# Altium PCB PCB2.PcbDoc
Units mm, origin at the board's own origin, x right, y up, seen from the top; angles counter-clockwise.
Board outline 100 x 65 mm, 2 copper layers (Top Layer, Bottom Layer); 34 components, 29 nets, 186 pads, 10 vias.
Unrouted connection lines stored in the file: 2.
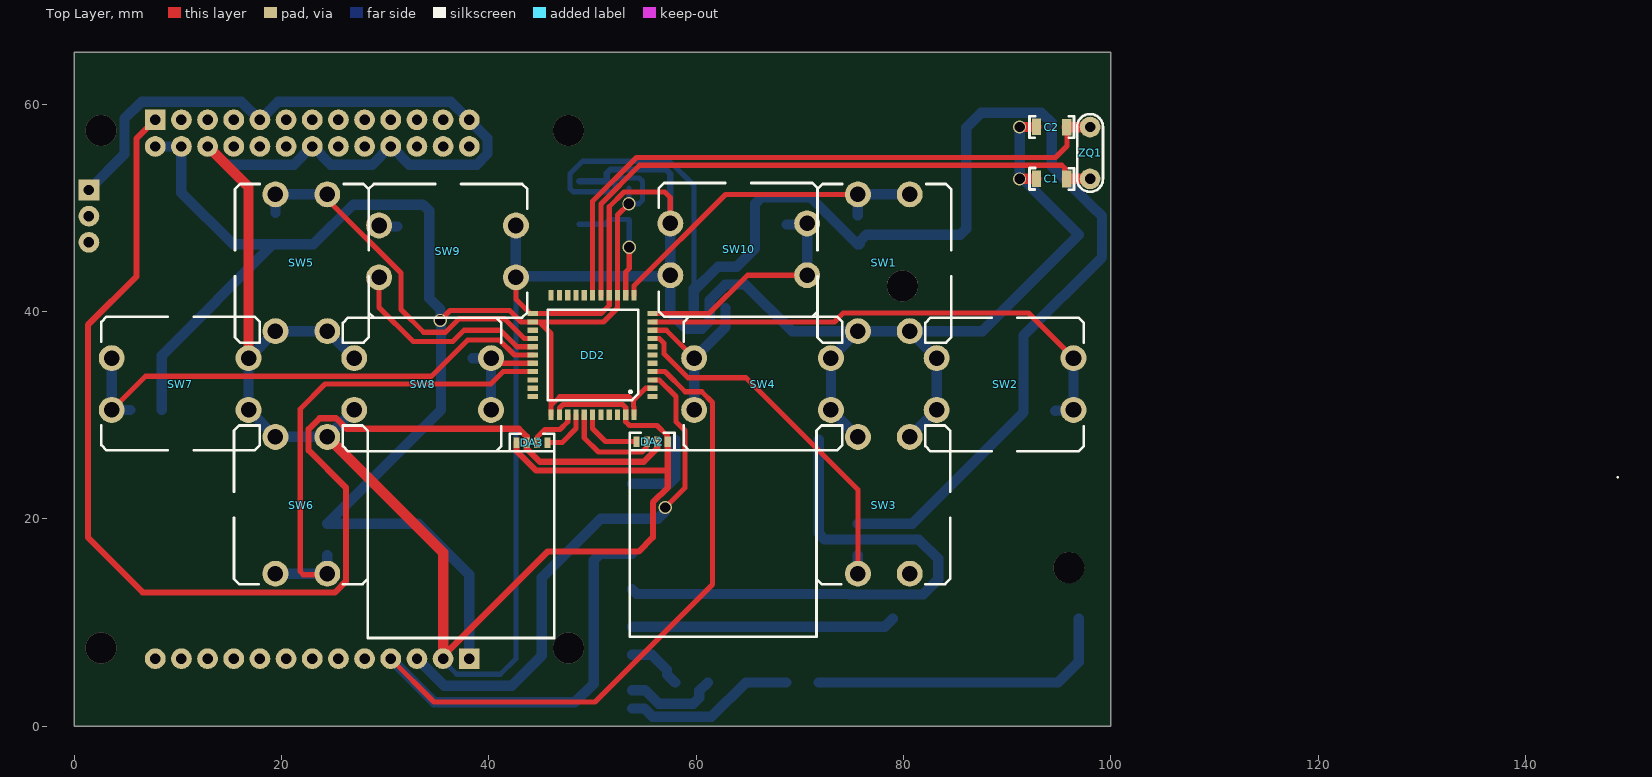
[diagram p0: Top Layer view]
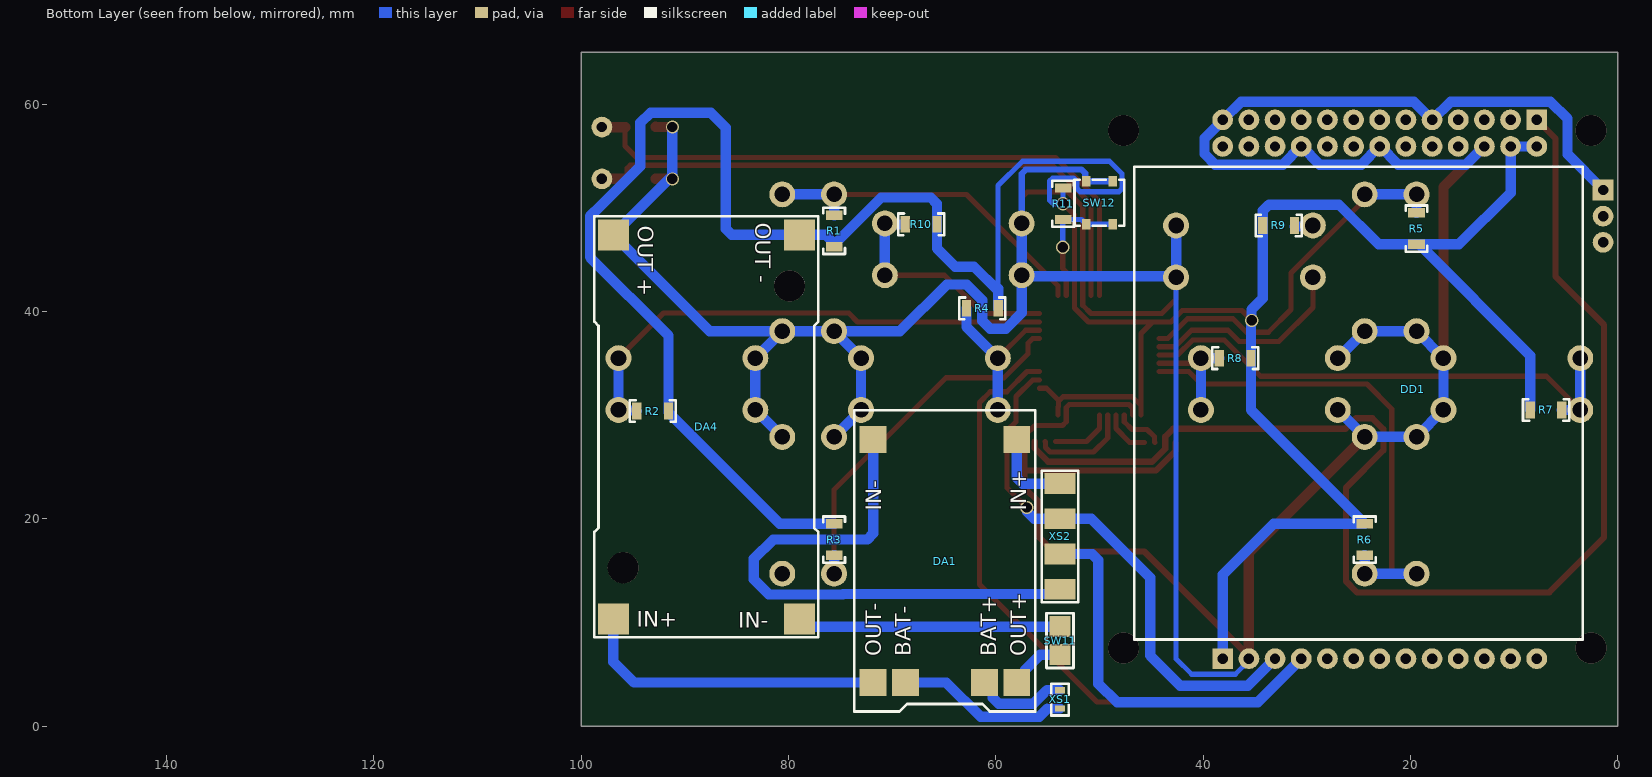
[diagram p1: Bottom Layer view, seen from below]
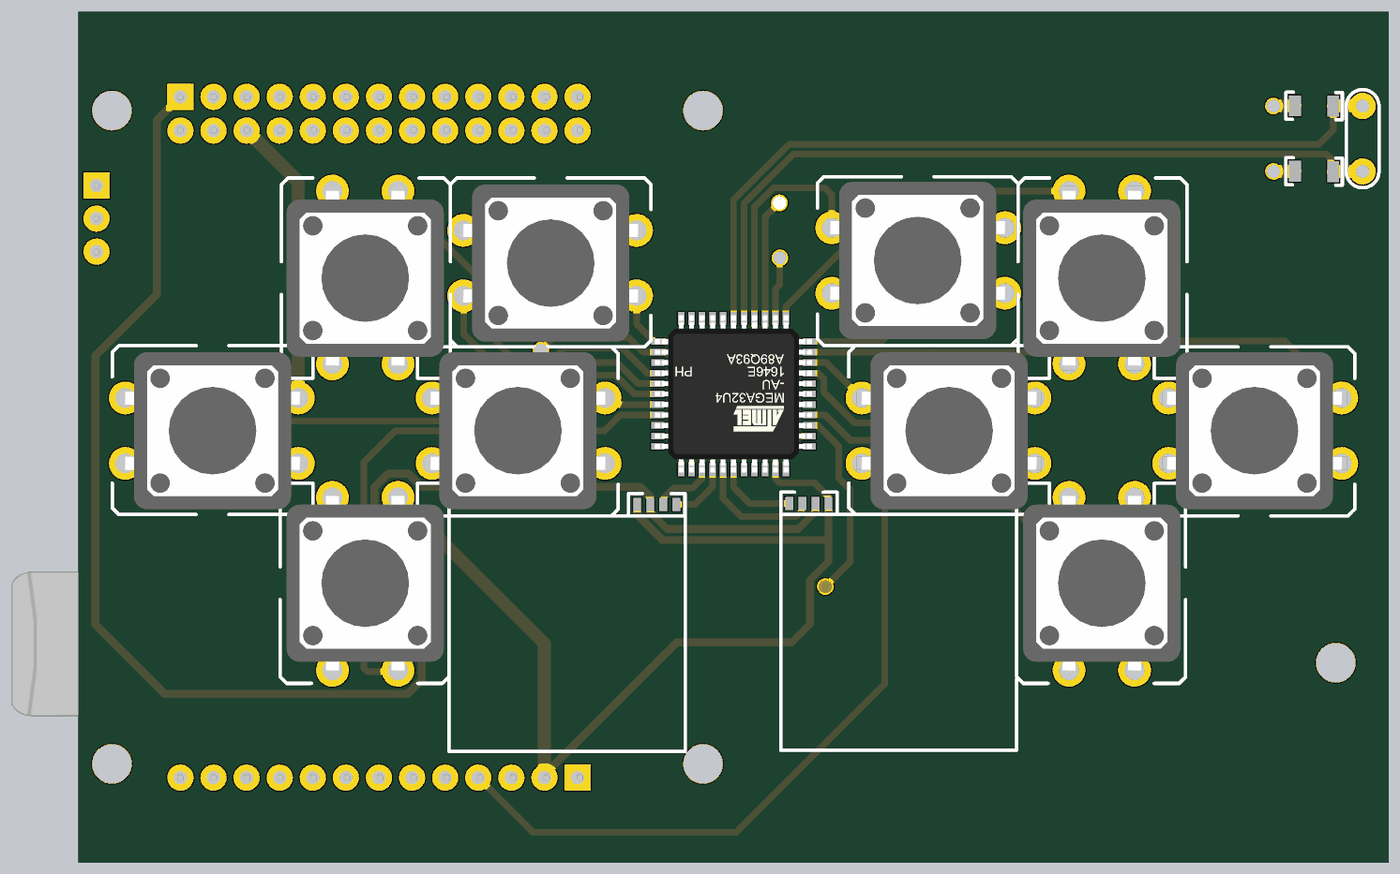
[diagram p2: 3D render of the assembled board from above, using the file's embedded part models]
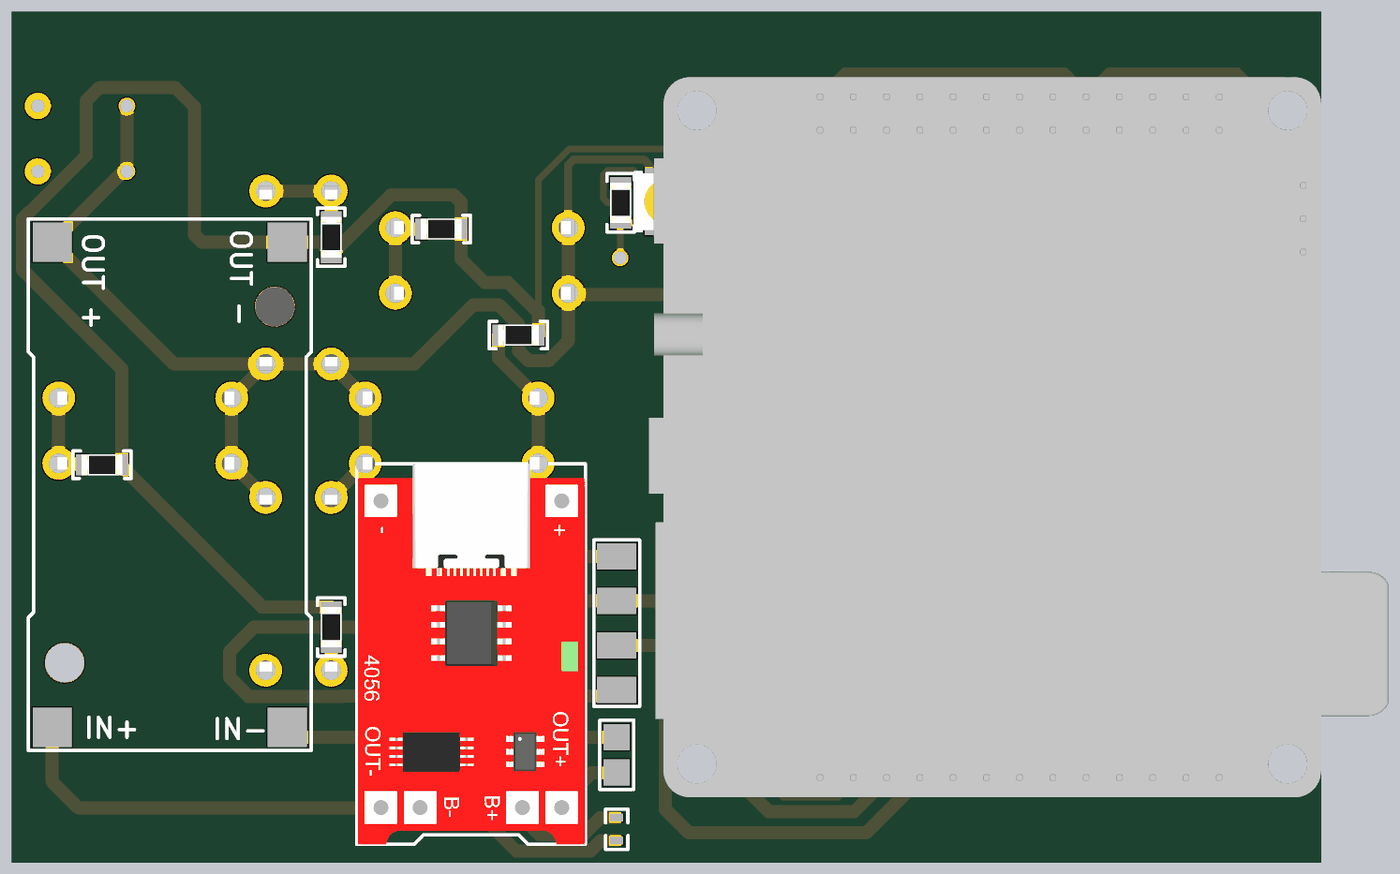
[diagram p3: 3D render of the assembled board from below, using the file's embedded part models]

## Layer stack, top to bottom
Top Solder: solder mask 0.0102, Solder Resist, Dk 3.5
Top Layer: signal copper 0.0356
Dielectric 1: dielectric 0.32, FR-4, Dk 4.8
Bottom Layer: signal copper 0.0356
Bottom Solder: solder mask 0.0102, Solder Resist, Dk 3.5

## Board outline
0,0 100,0 100,65 0,65

## Design rules (kind name [scope] priority, off if disabled: settings)
Clearance [All] p1: gap=0.254 ignorepadtopadclearanceinfootprint=FALSE
PolygonConnect [All] p1: connectstyle=Relief reliefconductorwidth=0.254 reliefentries=4 polygonreliefangle="90 Angle" airgapwidth=0.254
RoutingVias [All] p1: holewidth=1 width=1.27 viastyle="Through Hole" minholewidth=1 minwidth=1.27 maxholewidth=1 maxwidth=1.27
SolderMaskExpansion [All] p1: expansion=0.102 istentingtop=FALSE
SupplyNets "Schematic Supply Nets_2" [InNet('GND')] p1: voltage=0.000
SupplyNets "Schematic Supply Nets_1" [InNet('+5V')] p2: voltage=0.000
SupplyNets "Schematic Supply Nets" [InNet('+3.3V')] p3: voltage=0.000
Width [All] p1: maxlimit=1 minlimit=0.5 preferedwidth=0.6 minimp=50.000000 maximp=50.000000 favimp=50.000000
30 further rules are at their usual default settings.

## Components (designator, comment, footprint, x,y, rotation, side; value= is the part's Value field where it differs from the comment)
C1 "capasitor" "capacitor 1206" 94.3,52.8 r0 top
C2 "capasitor" "capacitor 1206" 94.3,57.8 r0 top
DA1 "1S 4056 BMS USB C" "1S 4056 BMS USB C" 64.8,15.5 r90 bottom
DA2 "joy stick 4 pin" "joy stick psp 4 pin" 55.748,27.45 r0 top
DA3 "joy stick 4 pin" "joy stick psp 4 pin" 44.147,27.35 r180 top
DA4 "DC-DC" DC-DC 87.925,28.875 r270 bottom
DD1 "orange PI ZERO 3" "orange Pi Zero 3" 25.125,32.5 r270 bottom locked
DD2 "ATmega32U4" atmega32u4 50,35.8 r180 top
R1 "resistor" "resistor 1206" 75.6,47.775 r270 bottom
R2 "resistor" "resistor 1206" 93.1,30.4 r180 bottom
R3 "resistor" "resistor 1206" 75.6,18 r90 bottom
R4 "resistor" "resistor 1206" 61.3,40.3 r180 bottom
R5 "resistor" "resistor 1206" 19.4,48 r270 bottom
R6 "resistor" "resistor 1206" 24.4,18 r90 bottom
R7 "resistor" "resistor 1206" 6.9,30.5 r0 bottom
R8 "resistor" "resistor 1206" 36.9,35.5 r180 bottom
R9 "resistor" "resistor 1206" 32.7,48.3 r0 bottom
R10 "resistor" "resistor 1206" 67.2,48.4 r180 bottom
R11 "resistor" "resistor 1206" 53.5,50.4 r90 bottom
SW1 "button" switchv1 78.2,44.5 r0 top locked
SW2 "button" switchv1 89.6,32.9 r270 top
SW3 "button" switchv1 78,21.5 r180 top
SW4 "button" switchv1 66.6,33.1 r90 top
SW5 "button" switchv1 22,44.5 r0 top
SW6 "button" switchv1 21.8,21.5 r180 top
SW7 "button" switchv1 10.4,33.1 r90 top
SW8 "button" switchv1 33.4,32.9 r270 top
SW9 "button" switchv1 36.2,45.9 r90 top
SW10 "button" switchv1 63.9,45.9 r270 top
SW11 "button" PowerButton 53.8,6.9 r90 bottom
SW12 "button" "membrane button" 49.995,50.5 r270 bottom
XS1 "power" power 53.825,2.55 r270 bottom
XS2 "TYPE-C" TYPE-C 53.8,18.3 r90 bottom
ZQ1 "quartz resonator" "quartz resonator 2" 98,55.3 r270 top

## Footprints (in the part's own frame and the unit in brackets; to place one, negate y for a bottom-side part, rotate by r counter-clockwise, add the part's x,y. Pads: shape width x height; smd on the part's side, far side on the other; paste and mask are expansions set on the pad)
"1S 4056 BMS USB C" [mm]
  rect 2.6x2.6 smd: 1(12.15,7.025) 2(12.15,-6.825) 3(-11.3,-3.7) 4(-11.3,3.9) 5(-11.3,7.025) 6(-11.3,-6.825)
  silkscreen extent -14.1,-8.6 14.97,8.85, body extent -14.11,-8.55 14.97,8.75, height 5.26
atmega32u4 [mm]
  rect 1x0.5 smd: 1(-5.775,4) 2(-5.775,3.2) 3(-5.775,2.4) 4(-5.775,1.6) 5(-5.775,0.8) 6(-5.775,0) 7(-5.775,-0.8) 8(-5.775,-1.6) 9(-5.775,-2.4) 10(-5.775,-3.2) 11(-5.775,-4) 23(5.775,-4) 24(5.775,-3.2) 25(5.775,-2.4) 26(5.775,-1.6) 27(5.775,-0.8) 28(5.775,0) 29(5.775,0.8) 30(5.775,1.6) 31(5.775,2.4) 32(5.775,3.2) 33(5.775,4)
  rect 0.5x1 smd: 12(-4,-5.775) 13(-3.2,-5.775) 14(-2.4,-5.775) 15(-1.6,-5.775) 16(-0.8,-5.775) 17(0,-5.775) 18(0.8,-5.775) 19(1.6,-5.775) 20(2.4,-5.775) 21(3.2,-5.775) 22(4,-5.775) 34(4,5.775) 35(3.2,5.775) 36(2.4,5.775) 37(1.6,5.775) 38(0.8,5.775) 39(0,5.775) 40(-0.8,5.775) 41(-1.6,5.775) 42(-2.4,5.775) 43(-3.2,5.775) 44(-4,5.775)
  silkscreen extent -4.4,-4.38 4.33,4.35, body extent -6,-6 6,6, height 1.05
"capacitor 1206" [mm]
  rect 0.9x1.6 smd: 1(-1.462,0.013) 2(1.463,-0.012)
  silkscreen extent -2.15,-1.05 2.15,1.05, body extent -1.56,-0.74 1.54,0.76, height 1.61
DC-DC [mm]
  rect 3x3 smd: 1(18.525,8.975) 2(18.525,-8.975) 3(-18.525,-8.975) 4(-18.525,8.975)
  round 3 hole 3: ""(-13.6,8.025) ""(13.6,-8.025)
  silkscreen extent -20.3,-10.8 20.3,10.8, body extent -20.1,-10.55 20.1,10.55, height 13.25
"joy stick psp 4 pin" [mm]
  rect 0.6x1 smd: 1(-1.5,0) 2(-0.5,0) 3(0.5,0) 4(1.5,0)
  silkscreen extent -2.15,-0.85 2.15,0.85
"membrane button" [mm]
  rect 1x0.8 smd: 1(-2.075,1.275) 1(-2.065,-1.274) 2(2.075,-1.275) 2(2.085,1.276)
  silkscreen extent -2.22,-2.41 2.23,2.4, body extent -2.22,-2.39 2.22,2.39, height 0.84
"orange Pi Zero 3" [mm]
  rect 2x2 hole 1: 1(-26,17.325) 27(-19.225,23.725) 42(26,-12.975)
  round 2 hole 1: 2(-26,14.8) 3(-26,12.275) 4(-26,9.75) 5(-26,7.225) 6(-26,4.7) 7(-26,2.175) 8(-26,-0.35) 9(-26,-2.875) 10(-26,-5.4) 11(-26,-7.925) 12(-26,-10.45) 13(-26,-12.975) 14(-23.425,17.325) 15(-23.425,14.8) 16(-23.425,12.275) 17(-23.425,9.75) 18(-23.425,7.225) 19(-23.425,4.7) 20(-23.425,2.175) 21(-23.425,-0.35) 22(-23.425,-2.875) 23(-23.425,-5.4) 24(-23.425,-7.925) 25(-23.425,-10.45) 26(-23.425,-12.975) 28(-16.7,23.725) 29(-14.175,23.725) 30(26,17.325) 31(26,14.8) 32(26,12.275) 33(26,9.75) 34(26,7.225) 35(26,4.7) 36(26,2.175) 37(26,-0.35) 38(26,-2.875) 39(26,-5.4) 40(26,-7.925) 41(26,-10.45)
  silkscreen extent -21.45,-21.5 24.15,21.75, body extent -27.5,-26.2 27.5,30.23, height 18.7
power [mm]
  rect 0.6x1 smd: 1(-0.9,0.025) 2(0.85,0.025)
  silkscreen extent -1.55,-0.82 1.53,0.88
PowerButton [mm]
  rect 2x2 smd: 1(0,0) 2(2.7,0)
  silkscreen extent -1.3,-1.3 4,1.3
"quartz resonator 2" [mm]
  round 2 hole 1: 1(-2.5,0) 2(2.5,0)
  silkscreen extent -3.75,-1.25 3.75,1.25
"resistor 1206" [mm]
  rect 0.9x1.6 smd: 1(-1.525,0) 2(1.525,0)
  silkscreen extent -2.22,-1.05 2.23,1.05, body extent -1.55,-0.8 1.55,0.8, height 0.56
switchv1 [mm]
  round 2.5 hole 1.5: 1(-2.6,-6.4) 1(2.4,-6.4) 2(-2.6,6.8) 2(2.4,6.8)
  silkscreen extent -6.5,-7.5 6.4,7.8, body extent -6.1,-6.9 5.9,7.2, height 8.41
TYPE-C [mm]
  rect 2x3 smd: 1(-5.1,0) 2(-1.7,0) 3(1.7,0) 4(5.1,0)
  silkscreen extent -6.36,-1.75 6.35,1.75

## Via types
v1: diameter 1.27, hole 1, Top Layer to Bottom Layer, 6 vias
v2: diameter 3, hole 3, Top Layer to Bottom Layer, 4 vias

## Nets (pads, with @x,y where several pads share a name; then routed paths per layer and width w, separated by ;. In a path a pad name is that pad's centre, name@x,y a point inside that pad or via, vN(x,y) a via of type N, cw(c..) or ccw(c..) an arc to the next point about the centre after c; other vN are vias at no path point)
+3.3V: DA2.3 DA3.3 DD1.1 | length 124.4
  Top Layer w0.6: DD1.1 6,56.7 6,43.4 1.3,38.7 1.3,18.2 6.604,12.896 25.147,12.896 26.204,13.953 26.204,22.996 22.596,26.604 22.596,28.647 23.653,29.704 25.245,29.704 26.253,28.696 42.885,28.696 43.647,27.933 DA3.3 43.647,26.767 44.914,25.5 54.948,25.5 56.248,26.8 DA2.3
+5V: DA4.4 DD1.14 DD1.15 DD1.42 DD2.2 DD2.14 DD2.24 DD2.34 DD2.44 R1.2 R2.2 R3.2 R4.2 R5.2 R6.2 R7.2 R8.2 R9.2 R10.2 R11.2 | length 312
  Top Layer w0.5: v1(35.3,39.147) 36.253,40.1 42,40.1 43.1,39 44.888,39 ; DD2.34 46,30.954 ; v1(53.5,50.4) 52.4,49.3 DD2.14 52.4,40.334 51.066,39 44.888,39 ; DD2.44 54,30.795 53.954,30.841 53.954,31.341 53.512,31.783 46.829,31.783 46,30.954 ; 54,31.488 55.112,32.6 DD2.2 ; 44.888,39 46,37.888 46,30.954
  Bottom Layer w0.5: R11.2 v1(53.5,50.4) 54.474,50.4 54.804,50.73 54.804,52.584 54.509,52.879 52.491,52.879 52.173,52.561 52.173,51.856 51.878,51.561 48.121,51.561 47.816,51.866 47.816,53.284 49.036,54.504 57.433,54.504 59.775,52.162 59.775,42.2
  Bottom Layer w1: DD1.14 DD1.15 10.325,51.475 15.325,46.475 R5.2@19.15,46.475 ; R7.2 8.425,35.75 R5.2@19.15,46.475 ; v1(35.3,39.147) 35.325,39.172 35.325,40.175 34.225,41.275 R9.2 34.225,49.718 33.639,50.304 26.88,50.304 23.051,46.475 R5.2@19.15,46.475 ; v1@35.325,39.002 35.375,38.952 R8.2 35.375,30.5 R6.2 33.175,19.525 38.1,14.6 DD1.42 ; R4.2 59.775,42.2 ; 59.825,42.042 62.1,44.317 63.892,44.317 65.675,46.1 65.675,50.414 66.261,51 71.034,51 75.559,46.475 75.75,46.475 75.8,46.525 75.8,46.775 76.425,47.4 DA4.4 85.467,47.4 86.053,47.986 86.053,57.753 87.489,59.189 93.311,59.189 94.3,58.2 94.3,54.019 98.665,49.654 98.712,49.654 99.154,49.212 99.154,45.256 91.575,37.677 R2.2 91.575,30.25 80.85,19.525 R3.2
GND: C1.1 C2.1 DA2.4 DA3.4 DA4.3 DD1.5 DD1.13 DD1.16 DD1.20 DD1.23 DD1.27 DD1.41 DD2.15 DD2.23 DD2.35 DD2.43 SW1.1 SW2.1 SW3.1 SW4.1 SW5.1 SW6.1 SW7.1 SW8.1 SW9.1 SW10.1 SW12.1 | length 431
  Top Layer w0.5: SW9.1@42.6,43.3 42.6,41.175 43.975,39.8 DD2.23 50.8,39.8 51.6,40.6 DD2.15 51.6,50.111 53.028,51.539 56.961,51.539 57.5,51 SW10.1@57.5,48.5 ; DD2.35 46.8,30.688 47.141,31.029 52.907,31.029 53.2,30.736 53.2,29.362 53.562,29 56.211,29 57.198,28.013 57.198,27.5 DA2.4
  Top Layer w0.6: DD1.41@35.575,6.758 45.647,16.831 54.431,16.831 55.82,18.22 55.82,21.583 57.248,23.011 57.248,24.7 ; DA3.4 42.647,26.559 44.56,24.646 57.194,24.646 57.248,24.7 ; DA2.4 57.248,24.7
  Top Layer w1: DD1.16 16.8,51.975 SW7.1@16.8,35.5 ; SW6.1@24.4,27.9 35.575,16.725 35.575,6.758 DD1.41 ; v1(91.2,52.8) 91.206,52.806 92.831,52.806 C1.1 ; v1@91.2,57.806 92.831,57.806 C2.1
  Bottom Layer w0.5: DD1.41 35.575,6.312 36.891,4.996 41.096,4.996 42.6,6.5 SW9.1@42.6,43.3
  Bottom Layer w0.6: SW12.1@48.72,52.575 48.725,52.57 51.264,52.57 51.269,52.565 51.369,52.665 51.369,53.349 51.721,53.7 57.1,53.7 57.5,53.3 SW10.1@57.5,48.5
  Bottom Layer w1: DD1.27 4.829,55.154 4.829,58.595 6.488,60.254 16.118,60.254 17.872,58.5 DD1.5 17.928,58.5 19.682,60.254 36.318,60.254 38.072,58.5 DD1.13 38.1,58.472 39.854,56.718 39.854,55.198 38.827,54.171 32.307,54.171 30.553,55.925 DD1.23 30.497,55.925 28.743,54.171 24.732,54.171 22.978,55.925 DD1.20 22.922,55.925 21.168,54.171 14.632,54.171 12.878,55.925 DD1.16 ; SW8.1@27,30.5 24.4,27.9 19.4,27.9 16.8,30.5 16.8,35.5 19.4,38.1 24.4,38.1 SW8.1@27,35.5 ; SW9.1@42.6,48.3 42.6,43.3 42.7,43.4 57.4,43.4 SW10.1@57.5,43.5 ; SW10.1@57.5,48.5 SW10.1@57.5,43.5 ; SW3.1@75.6,27.9 73,30.5 73,35.5 SW1.1@75.6,38.1 ; SW3.1@80.6,27.9 83.2,30.5 83.2,35.5 SW1.1@80.6,38.1 ; v1(91.2,57.8) v1(91.2,52.8) 91.252,52.748 91.552,52.748 DA4.3 87.6,38.1 SW1.1@80.6,38.1 ; SW10.1@57.5,43.5 57.5,39.859 59.013,38.346 60.537,38.346 61.3,39.109 61.3,41.1 62.8,42.6 64.75,42.6 69.25,38.1 SW1.1@75.6,38.1 ; SW1.1@75.6,38.1 SW1.1@80.6,38.1
NetC1_2: C1.2 DD2.16 ZQ1.2 | length 58.6
  Top Layer w0.5: DD2.16 50.8,50.377 54.539,54.117 95.27,54.117 95.562,53.824 95.562,52.988 C1.2
  Top Layer w1: C1.2 95.769,52.794 97.994,52.794 ZQ1.2
NetC2_2: C2.2 DD2.17 ZQ1.1 | length 61.1
  Top Layer w0.5: DD2.17 50,50.643 54.227,54.871 94.671,54.871 95.763,55.962 C2.2
  Top Layer w1: C2.2 95.769,57.794 97.994,57.794 ZQ1.1
NetDA1_1: DA1.1 XS2.1 | length 53.9
  Bottom Layer w1: XS2.1 54.253,12.747 74.719,12.747 74.77,12.696 81.896,12.696 83.347,14.147 83.347,16.128 81.475,18 72.411,18 71.825,18.586 DA1.1
NetDA1_2: DA1.2 XS2.4 | length 8.1
  Bottom Layer w1: XS2.4@53.812,23.388 57.389,23.388 57.975,23.974 DA1.2
NetDA1_3: DA1.3 XS1.1 | length 9.1
  Bottom Layer w1: XS1.1 55.059,3.45 56.363,2.146 59.714,2.146 60.3,2.732 60.3,3.4 DA1.3
NetDA1_4: DA1.4 XS1.2 | length 16.6
  Bottom Layer w1: XS1.2 55,1.7 55.808,0.892 61.458,0.892 64.766,4.2 DA1.4
NetDA1_5: DA1.5 DA4.2 | length 30.1
  Bottom Layer w1: DA1.5 94.9,4.2 96.9,6.2 DA4.2
NetDA1_6: DA1.6 SW11.1 | length 5.5
  Bottom Layer w1: SW11.1 53.814,6.886 55.714,6.886 57.175,5.425 57.175,5 DA1.6
NetDA2_1: DA2.1 DD2.39 | length 6.1
  Top Layer w0.5: DD2.39 50,28.7 51.25,27.45 DA2.1
NetDA2_2: DA2.2 DD2.38 | length 9.6
  Top Layer w0.5: DD2.38 49.2,27.8 50.554,26.446 54.757,26.446 55.198,26.887 55.198,27.4 DA2.2
NetDA3_1: DA3.1 DD2.37 | length 4.6
  Top Layer w0.5: DA3.1 45.681,27.35 45.697,27.367 47.067,27.367 48.4,28.7 DD2.37
NetDA3_2: DA3.2 DD2.36 | length 4.7
  Top Layer w0.5: DA3.2 44.697,27.4 44.697,27.913 45.399,28.614 46.852,28.614 47.6,29.362 DD2.36
NetDA4_1: DA4.1 SW11.2 | length 25.5
  Bottom Layer w1: SW11.2 78.2,9.6 DA4.1
NetDD1_39: DD1.39 DD2.4 XS2.2 | length 99.9
  Top Layer w0.5: DD1.39 34.689,2.335 50.235,2.335 61.554,13.654 61.554,31.227 60.527,32.254 58.946,32.254 57,34.2 DD2.4
  Bottom Layer w1: DD1.39 34.725,2.3 48.3,2.3 50.1,4.1 50.1,16.014 50.686,16.6 XS2.2
NetDD1_40: DD1.40 DD2.3 XS2.3 | length 51.6
  Top Layer w0.5: DD2.3 56.438,33.4 58.046,31.792 58.046,29.371 58.905,28.513 58.905,22.986 v1(57.009,21.091)
  Bottom Layer w1: DD1.40 33.078,6.5 35.678,3.9 42.2,3.9 45.106,6.806 45.106,14.306 50.8,20 56.299,20 56.958,20.659 56.958,21.039 v1(57.009,21.091)
NetDD2_8: DD2.8 R3.1 SW3.2 | length 36.3
  Top Layer w0.5: DD2.8 56.438,37.4 56.9,36.938 56.9,35.919 59.219,33.6 64.8,33.6 75.6,22.8 SW3.2@75.6,14.7
  Bottom Layer w1: SW3.2@75.6,14.7 R3.1
NetDD2_9: DD2.9 R4.1 SW4.2 | length 16.2
  Top Layer w0.5: DD2.9 57.1,38.2 SW4.2@59.8,35.5
  Bottom Layer w1: SW4.2@59.8,30.5 59.8,35.5 62.825,38.525 R4.1
NetDD2_10: DD2.10 R2.1 SW2.2 | length 49.6
  Top Layer w0.5: DD2.10 73.338,39 74.192,39.854 92.046,39.854 SW2.2@96.4,35.5
  Bottom Layer w1: R2.1 94.675,30.45 96.35,30.45 96.4,30.5 SW2.2@96.4,35.5
NetDD2_11: DD2.11 R10.1 SW10.2 | length 23.2
  Top Layer w0.5: DD2.11 61.242,39.8 64.942,43.5 SW10.2@70.7,43.5
  Bottom Layer w1: R10.1 SW10.2@70.5,48.4 ; SW10.2@70.7,43.5 SW10.2@70.7,48.5
NetDD2_12: DD2.12 R1.1 SW1.2 | length 33.2
  Top Layer w0.5: DD2.12 54,42.481 62.819,51.3 SW1.2@75.6,51.3
  Bottom Layer w1: R1.1 75.6,51.3 SW1.2@80.6,51.3
NetDD2_13: DD2.13 R11.1 SW12.2 | length 12.5
  Top Layer w0.5: DD2.13 53.2,43.8 53.539,44.139 v1(53.539,46.2)
  Bottom Layer w0.5: SW12.2@48.719,48.415 48.724,48.42 51.265,48.42 51.27,48.425 51.27,48.525 51.42,48.675 51.52,48.675 51.72,48.875 R11.1 53.539,48.836 v1(53.539,46.2) v1@53.5,46.2
NetDD2_26: DD2.26 R5.1 SW5.2 | length 35.8
  Top Layer w0.5: SW5.2@24.4,51.3 24.4,50.819 31.5,43.719 31.5,40.2 33.7,38 35.8,38 37.1,39.3 41.5,39.3 43.4,37.4 DD2.26
  Bottom Layer w1: R5.1 19.4,51.3 SW5.2@24.4,51.3
NetDD2_27: DD2.27 R9.1 SW9.2 | length 22
  Top Layer w0.5: SW9.2@29.4,43.3 29.4,40.4 32.7,37.1 36.5,37.1 37.6,38.2 41.118,38.2 42.718,36.6 DD2.27
  Bottom Layer w1: SW9.2@29.4,48.2 R9.1@31.175,48.2
NetDD2_28: DD2.28 R7.1 SW7.2 | length 50.8
  Top Layer w0.5: SW7.2@3.6,30.5 6.846,33.746 34.446,33.746 37.954,37.254 40.997,37.254 42.451,35.8 DD2.28
  Bottom Layer w1: SW7.2@3.6,35.5 3.6,30.5 R7.1
NetDD2_29: DD2.29 R8.1 SW8.2 | length 11
  Top Layer w0.5: SW8.2@40.2,35.5 40.741,35.5 41.241,35 DD2.29
  Bottom Layer w1: R8.1 40.2,35.5 SW8.2@40.2,30.5
NetDD2_30: DD2.30 R6.1 SW6.2 | length 49.2
  Top Layer w0.5: SW6.2@24.4,14.7 24.308,14.608 22.085,14.608 21.792,14.901 21.792,30.592 24.192,32.992 40.173,32.992 41.381,34.2 DD2.30
  Bottom Layer w1: SW6.2@19.4,14.7 24.4,14.7 R6.1
pads on no net: DA4. DD1.2 DD1.3 DD1.4 DD1.6 DD1.7 DD1.8 DD1.9 DD1.10 DD1.11 DD1.12 DD1.17 DD1.18 DD1.19 DD1.21 DD1.22 DD1.24 DD1.25 DD1.26 DD1.28 DD1.29 DD1.30 DD1.31 DD1.32 DD1.33 DD1.34 DD1.35 DD1.36 DD1.37 DD1.38 DD2.1 DD2.5 DD2.6 DD2.7 DD2.18 DD2.19 DD2.20 DD2.21 DD2.22 DD2.25 DD2.31 DD2.32 DD2.33 DD2.40 DD2.41 DD2.42
copper on no net:
  other v2: 2.575,7.55 47.675,7.55 2.575,57.45 47.675,57.45

## Silkscreen, mask and mechanical layers (free items; w line width, h text height)
Top Overlay:
  lines w0.254: 28.3,8.5 28.3,26.5 46.3,26.5 ; 28.3,8.5 28.3,8.5 ; 28.3,8.5 46.3,8.5 46.3,26.5 ; 46.3,26.5 46.3,26.5 ; 53.6,8.6 71.6,8.6 71.6,26.6 53.6,26.6 53.6,8.6 ; 53.6,8.6 53.6,8.6 ; 148.9,24 148.9,24
Mechanical 1:
  the board outline again, w0.254

## Text inside footprints (layer, text, board x,y; h text height)
DA1: Bottom Overlay "OUT+" at 57.054,6.754 h1.52 r270; Bottom Overlay "OUT-" at 71.054,6.754 h1.52 r270; Bottom Overlay "BAT-" at 68.179,6.754 h1.52 r270; Bottom Overlay "BAT+" at 59.929,6.754 h1.52 r270; Bottom Overlay "IN+" at 57.054,20.754 h1.52 r270; Bottom Overlay "IN-" at 71.054,20.754 h1.52 r270
DA4: Bottom Overlay "OUT -" at 83.226,48.563 h1.52 r90; Bottom Overlay "OUT +" at 94.526,48.263 h1.52 r90; Bottom Overlay "IN+" at 94.626,9.571 h1.52; Bottom Overlay "IN-" at 84.826,9.471 h1.52